# Altium PCB Xilinx_JTAG-SMT2.PcbDoc
Units mm, origin at the board's own origin, x right, y up, seen from the top; angles counter-clockwise.
Board outline 45.5 x 23.5 mm, 2 copper layers (Top Layer, Bottom Layer); 55 components, 56 nets, 269 pads, 148 vias.
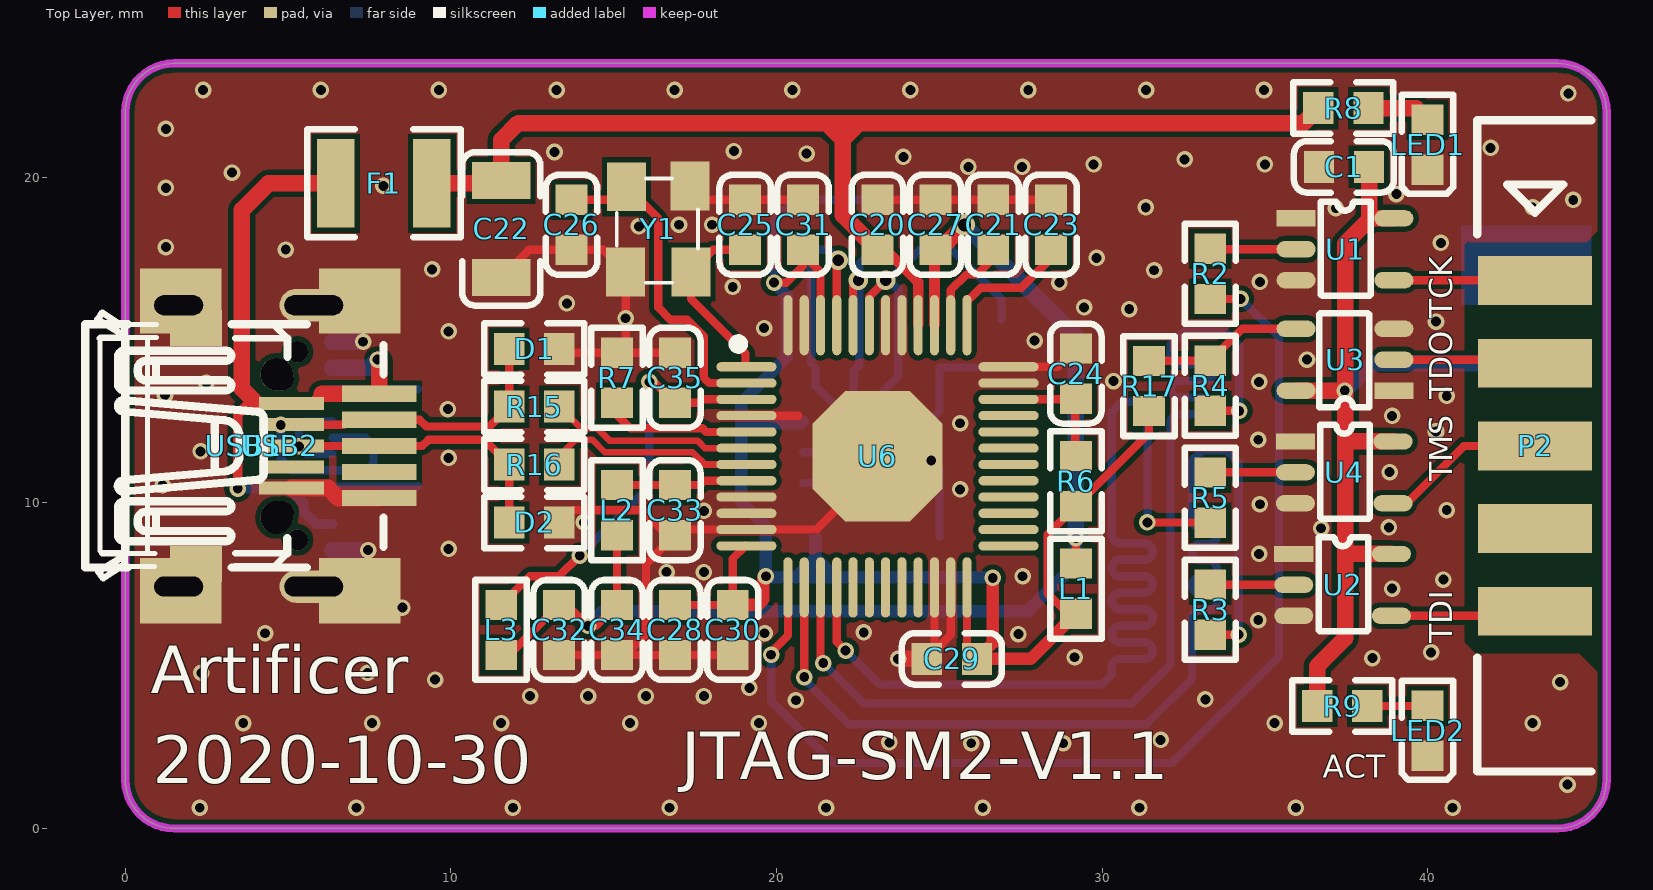
[diagram p0: Top Layer view]
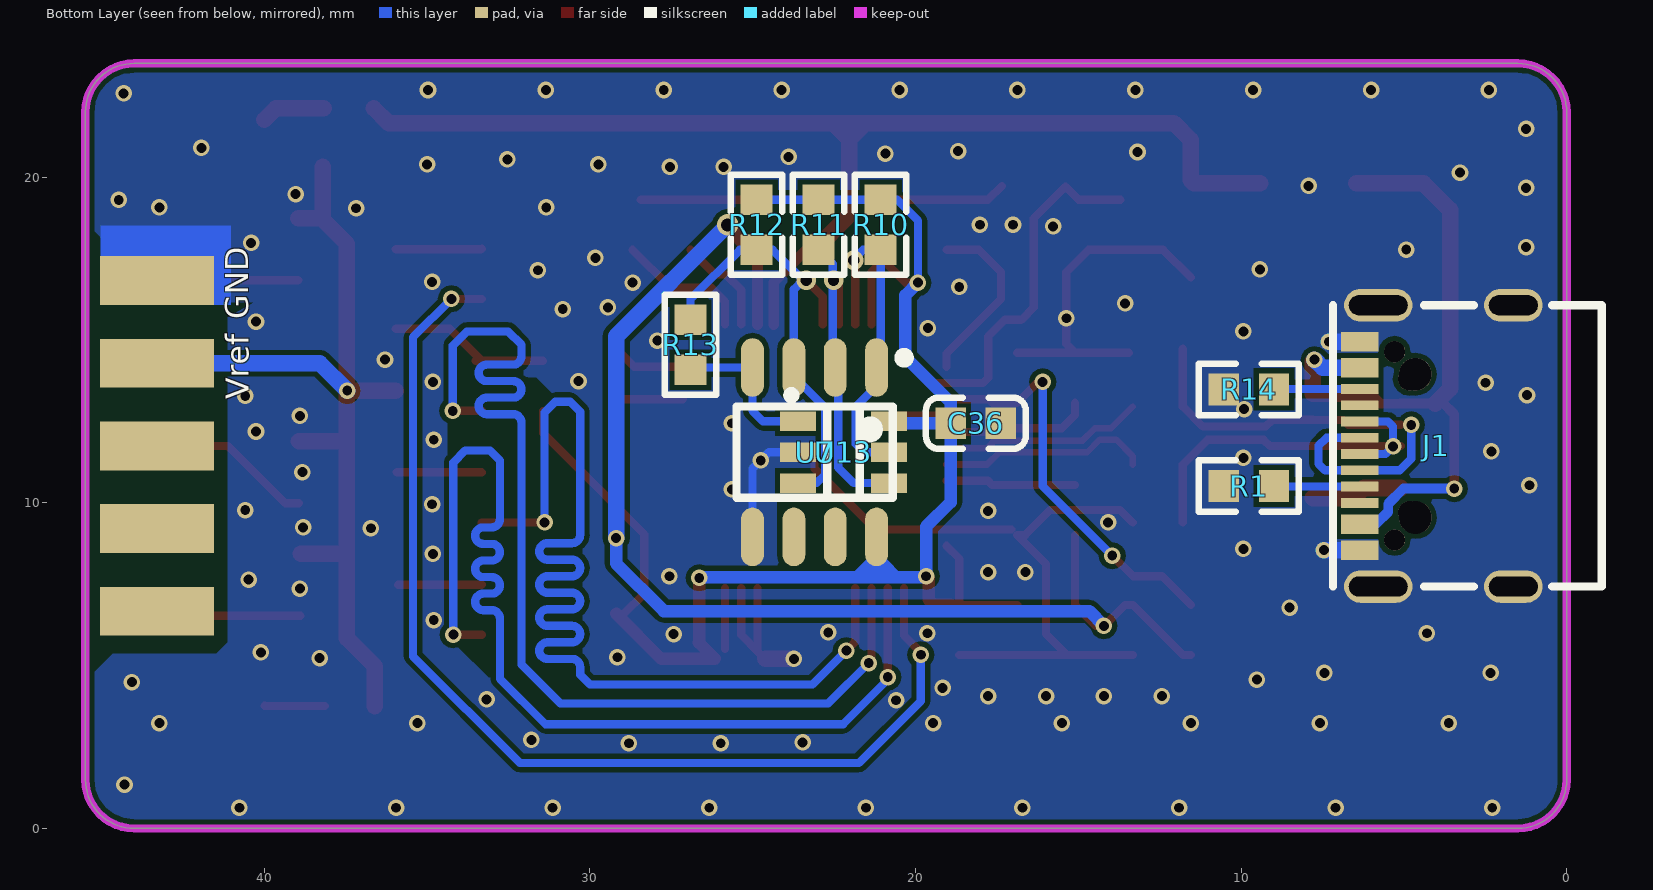
[diagram p1: Bottom Layer view, seen from below]

## Layer stack, top to bottom
Top Solder: solder mask 0.0102, Solder Resist, Dk 3.5
Top Layer: signal copper 0.0356
Dielectric 1: dielectric 0.32, FR-4, Dk 4.8
Bottom Layer: signal copper 0.0356
Bottom Solder: solder mask 0.0102, Solder Resist, Dk 3.5

## Board outline
0,1.5 0,22 cw(c1.5,22) 1.5,23.5 44,23.5 cw(c44,22) 45.5,22 45.5,1.5 cw(c44,1.5) 44,0 1.5,0 cw(c1.5,1.5)

## Design rules (kind name [scope] priority, off if disabled: settings)
Clearance [All] p1: gap=0.152
ComponentClearance [All] p1 off: gap=0.254 collisioncheckmode=3 verticalgap=0.254 showdistances=FALSE
DiffPairsRouting [All] p1: maxlimit=0.254 minlimit=0.254 mostfreqgap=0.254 toplayer_minwidth=0.381 toplayer_maxwidth=0.381 toplayer_prefwidth=0.381 bottomlayer_minwidth=0.381 bottomlayer_maxwidth=0.381 bottomlayer_prefwidth=0.381 maxuncoupledlength=12.7
HoleSize [All] p1: absolutevalues=TRUE maxlimit=3 minlimit=0.025 maxpercent=80.000 minpercent=20.000
HoleToHoleClearance [All] p1 off: gap=0.254 allowstackedmicrovias=TRUE
MinimumSolderMaskSliver [All] p1 off: minsoldermaskwidth=0.254
PolygonConnect PolygonConnect_GND [InNet('GND')] p1: connectstyle=Direct reliefconductorwidth=0.254 reliefentries=4 polygonreliefangle="90 Angle" airgapwidth=0.254
PolygonConnect [All] p2: connectstyle=Relief reliefconductorwidth=0.254 reliefentries=4 polygonreliefangle="90 Angle" airgapwidth=0.254
RoutingVias [All] p1: holewidth=0.305 width=0.508 viastyle="Through Hole" minholewidth=0.305 minwidth=0.508 maxholewidth=0.711 maxwidth=1.27
SilkToSilkClearance [All] p1 off: silktosilkclearance=0.254
SilkToSolderMaskClearance [IsPad] p1 off: minsilkscreentomaskgap=0.254 clearancetoexposedcopper=TRUE
SolderMaskExpansion [All] p1: expansion=0.102
Width [All] p1: maxlimit=3 minlimit=0.152 preferedwidth=0.152
23 further rules are at their usual default settings.

## Classes and differential pairs
net class jatg: TCK TDI TDO TMS
differential pair USB: +USB_P -USB_N
differential pair USBD: +USBD_P -USBD_N

## Components (designator, comment, footprint, x,y, rotation, side; value= is the part's Value field where it differs from the comment)
C1 "0.1uF" LC-0603_C 37.432,20.32 r180 top
C20 "0.1uF" LC-0603_C 23.103,18.542 r90 top
C21 "0.1uF" LC-0603_C 26.659,18.542 r90 top
C22 "10uF" LC-1206_C 11.546,18.415 r270 top
C23 "0.1uF" LC-0603_C 28.437,18.542 r90 top
C24 "0.1uF" LC-0603_C 29.199,13.97 r270 top
C25 "27pF" LC-0603_C 19.039,18.542 r270 top
C26 "27pF" LC-0603_C 13.705,18.542 r270 top
C27 "0.1uF" LC-0603_C 24.881,18.542 r90 top
C28 "0.1uF" LC-0603_C 16.88,6.096 r270 top
C29 "0.1uF" LC-0603_C 25.389,5.207 r180 top
C30 "0.1uF" LC-0603_C 18.658,6.096 r270 top
C31 "0.1uF" LC-0603_C 20.817,18.542 r90 top
C32 "0.1uF" LC-0603_C 13.324,6.096 r270 top
C33 "0.1uF" LC-0603_C 16.88,9.779 r270 top
C34 "0.1uF" LC-0603_C 15.102,6.096 r270 top
C35 "0.1uF" LC-0603_C 16.88,13.843 r90 top
C36 "0.1uF" LC-0603_C 18.15,12.446 r180 bottom
D1 "Res1" LC-0603_R 12.562,14.732 r0 top
D2 "Res1" LC-0603_R 12.562,9.398 r0 top
F1 "Fuse 1" LC-1210_R 7.941,19.812 r0 top
J1 "TYPE-C16PIN" USB-C-SMD_TYPE-C16PIN 4,11.75 r90 bottom locked
L1 "120OHM@100Mhz" LC-0603_L 29.199,7.366 r270 top
L2 "120OHM@100Mhz" LC-0603_L 15.102,9.779 r90 top
L3 "120OHM@100Mhz" LC-0603_L 11.546,6.096 r90 top
LED1 "LED-SMD" MY-0603_LED_B 40,21 r90 top locked
LED2 "LED-SMD" MY-0603_LED_B 40,3 r90 top locked
P2 "Header 5X2" HD2x5_W 43.3,16.83 r0 top locked
R1 "Res1" LC-0603_R 9.762,10.516 r0 bottom
R2 "Res1" LC-0603_R 33.325,17.035 r90 top
R3 "Res1" LC-0603_R 33.325,6.723 r90 top
R4 "Res1" LC-0603_R 33.325,13.598 r90 top
R5 "Res1" LC-0603_R 33.325,10.16 r90 top
R6 "Res1" LC-0603_R 29.199,10.668 r90 top
R7 "Res1" LC-0603_R 15.102,13.843 r270 top
R8 "Res1" LC-0603_R 37.414,22.123 r0 top
R9 "Res1" LC-0603_R 37.381,3.759 r0 top
R10 "Res1" LC-0603_R 21.071,18.542 r90 bottom
R11 "Res1" LC-0603_R 22.976,18.542 r90 bottom
R12 "Res1" LC-0603_R 24.881,18.542 r90 bottom
R13 "Res1" LC-0603_L 26.913,14.859 r270 bottom
R14 "Res1" LC-0603_R 9.762,13.487 r0 bottom
R15 "Res1" LC-0603_R 12.562,12.954 r180 top
R16 "Res1" LC-0603_R 12.562,11.176 r180 top
R17 "Res1" LC-0603_R 31.445,13.589 r270 top
U1 "SN74LVC1G125" SOT-23-5 35.913,18.74 r0 top
U2 "SN74LVC1G125" SOT-23-5 35.839,8.433 r0 top
U3 "SN74LVC1G125" SOT-23-5 39.014,13.447 r180 top
U4 "SN74LVC1G125" SOT-23-5 35.887,11.887 r0 top
U6 "FT232HL" MY-LQFP-QFN-48_7X7X05P 23.103,11.43 r270 top locked
U7 "93LC56BISN" LC-SOIC-8_150mil 23.103,11.557 r0 bottom
U13 "93LC56BT" LC-SOT-23-6 22.214,11.557 r0 bottom
USB1 "USB5PIN" MICROUSB 3.5,11.75 r90 top locked
USB2 "MICRO-USB-SMD_MINI 5P" "MICRO-USB-SMD_MINI 5P" 4.5,11.75 r0 top locked
Y1 "12MHz" XTAL-3225 16.372,18.415 r0 top

## Footprints (in the part's own frame and the unit in brackets; to place one, negate y for a bottom-side part, rotate by r counter-clockwise, add the part's x,y. Pads: shape width x height; smd on the part's side, far side on the other; paste and mask are expansions set on the pad)
HD2x5_W [mm]
  rect 3.5x1.5 smd: 1(0,0) 3(0,-2.54) 5(0,-5.08) 7(0,-7.62) 9(0,-10.16)
  rect 3.5x1.5 smd far side: 2(0,0) 4(0,-2.54) 6(0,-5.08) 8(0,-7.62) 10(0,-10.16)
  silkscreen extent -1.78,-15.08 1.72,4.92
LC-0603_C [mm]
  rect 0.93x0.98 smd: 1(-0.77,0) 2(0.77,0)
  silkscreen extent -1.53,-0.79 1.54,0.79, body extent -0.8,-0.4 0.8,0.4, height 0.3
LC-0603_L [mm]
  rect 0.93x0.98 smd: 1(-0.77,0) 2(0.77,0)
  silkscreen extent -1.53,-0.79 1.54,0.79, body extent -0.82,-0.41 0.83,0.41, height 0.46
LC-0603_R [mm]
  rect 0.93x0.98 smd: 1(-0.77,0) 2(0.77,0)
  silkscreen extent -1.53,-0.79 1.54,0.79, body extent -0.85,-0.4 0.85,0.4, height 0.56
LC-1206_C [mm]
  rect 1.13x1.8 smd: 1(-1.49,0) 2(1.49,0)
  silkscreen extent -2.36,-1.2 2.35,1.2, body extent -1.6,-0.81 1.6,0.79, height 1
LC-1210_R [mm]
  rect 1.16x2.72 smd: 1(-1.475,0) 2(1.475,0)
  silkscreen extent -2.35,-1.66 2.36,1.66, body extent -1.6,-1.25 1.6,1.25, height 0.6
LC-SOIC-8_150mil [mm]
  oval 0.7x1.8 smd: 1(-1.905,-2.6) 2(-0.635,-2.6) 3(0.635,-2.6) 4(1.905,-2.6) 5(1.905,2.6) 6(0.635,2.6) 7(-0.635,2.6) 8(-1.905,2.6)
  silkscreen extent -2.9,-3.05 2.4,1.4
LC-SOT-23-6 [mm]
  rect 1.1x0.6 smd: 1(1.4,-0.95) 2(1.4,0) 3(1.4,0.95) 4(-1.4,0.95) 5(-1.4,0) 6(-1.4,-0.95)
  silkscreen extent -0.5,-1.87 1.73,1.4
"MICRO-USB-SMD_MINI 5P" [mm]
  rect 2.3x0.5 smd: 1(3.3,1.6) 2(3.3,0.8) 3(3.3,0) 4(3.3,-0.8) 5(3.3,-1.6)
  rect 2.5x2 smd: 6(2.7,-4.45) 7(-2.8,-4.45) 8(-2.8,4.45) 9(2.7,4.45)
  round 1 hole 1 unplated: ""(0.15,-2.2) ""(0.15,2.2)
  silkscreen extent -5.73,-3.74 3.43,3.74
MICROUSB [mm]
  round 0.7 hole 0.7: 0(-2.05,-1.325) 0(2.05,-1.325)
  rect 0.4x2 smd: 1(1.3,-1.6) 2(0.65,-1.6) 3(0,-1.6) 4(-0.65,-1.6) 5(-1.3,-1.6)
  rect 1.1x1.6 smd: 6(-3.625,1.325) 7(3.625,1.325)
  silkscreen extent -4.06,-1.48 4.09,4.36, body extent -4,-1.67 4,3.96, height 2.7
MY-0603_LED_B [mm]
  rect 0.93x0.98 smd: A(0.77,0) K(-0.77,0)
  silkscreen extent -1.5,-0.79 1.54,0.79, body extent -0.8,-0.4 0.8,0.4, height 0.61
MY-LQFP-QFN-48_7X7X05P [mm]
  oval 0.28x0.8 smd mask+0.051: 1(-2.75,-3.5) 2(-2.25,-3.5) 3(-1.75,-3.5) 4(-1.25,-3.5) 5(-0.75,-3.5) 6(-0.25,-3.5) 7(0.25,-3.5) 8(0.75,-3.5) 9(1.25,-3.5) 10(1.75,-3.5) 11(2.25,-3.5) 12(2.75,-3.5) 25(2.75,3.5) 26(2.25,3.5) 27(1.75,3.5) 28(1.25,3.5) 29(0.75,3.5) 30(0.25,3.5) 31(-0.25,3.5) 32(-0.75,3.5) 33(-1.25,3.5) 34(-1.75,3.5) 35(-2.25,3.5) 36(-2.75,3.5)
  oval 0.28x1.8 smd mask+0.051: 1(-2.75,-4.05) 2(-2.25,-4.05) 3(-1.75,-4.05) 4(-1.25,-4.05) 5(-0.75,-4.05) 6(-0.25,-4.05) 7(0.25,-4.05) 8(0.75,-4.05) 9(1.25,-4.05) 10(1.75,-4.05) 11(2.25,-4.05) 12(2.75,-4.05) 25(2.75,4.05) 26(2.25,4.05) 27(1.75,4.05) 28(1.25,4.05) 29(0.75,4.05) 30(0.25,4.05) 31(-0.25,4.05) 32(-0.75,4.05) 33(-1.25,4.05) 34(-1.75,4.05) 35(-2.25,4.05) 36(-2.75,4.05)
  oval 0.8x0.28 smd mask+0.051: 13(3.5,-2.75) 14(3.5,-2.25) 15(3.5,-1.75) 16(3.5,-1.25) 17(3.5,-0.75) 18(3.5,-0.25) 19(3.5,0.25) 20(3.5,0.75) 21(3.5,1.25) 22(3.5,1.75) 23(3.5,2.25) 24(3.5,2.75) 37(-3.5,2.75) 38(-3.5,2.25) 39(-3.5,1.75) 40(-3.5,1.25) 41(-3.5,0.75) 42(-3.5,0.25) 43(-3.5,-0.25) 44(-3.5,-0.75) 45(-3.5,-1.25) 46(-3.5,-1.75) 47(-3.5,-2.25) 48(-3.5,-2.75)
  oval 1.8x0.28 smd mask+0.051: 13(4.05,-2.75) 14(4.05,-2.25) 15(4.05,-1.75) 16(4.05,-1.25) 17(4.05,-0.75) 18(4.05,-0.25) 19(4.05,0.25) 20(4.05,0.75) 21(4.05,1.25) 22(4.05,1.75) 23(4.05,2.25) 24(4.05,2.75) 37(-4.05,2.75) 38(-4.05,2.25) 39(-4.05,1.75) 40(-4.05,1.25) 41(-4.05,0.75) 42(-4.05,0.25) 43(-4.05,-0.25) 44(-4.05,-0.75) 45(-4.05,-1.25) 46(-4.05,-1.75) 47(-4.05,-2.25) 48(-4.05,-2.75)
  oct 4x4 smd mask+0.051: 49(0,0)
  silkscreen extent -3.6,-4.42 -3.3,-4.13, body extent -4.5,-4.33 4.5,4.68, height 1.6
SOT-23-5 [mm]
  rect 1.2x0.5 smd: 1(0.051,0)
  oval 1.2x0.5 smd: 2(0.051,-0.95) 3(0.051,-1.9) 4(3.051,-1.9) 5(3.051,0)
  silkscreen extent 0.81,-2.38 2.34,0.51
USB-C-SMD_TYPE-C16PIN [mm]
  oval 1x2.099 hole 0.61 slot 1.8 at 90 deg: 1(-4.32,1.787) 2(4.32,1.787)
  oval 1x1.799 hole 0.61 slot 1.5 at 90 deg: 3(-4.32,-2.363) 4(4.32,-2.363)
  rect 0.6x1.15 smd: A1B12(-3.2,2.362) A4B9(-2.4,2.362) B1A12(3.2,2.362) B4A9(2.4,2.362)
  rect 0.3x1.15 smd: A5(-1.25,2.362) A6(-0.25,2.362) A7(0.25,2.362) A8(-1.75,2.362) B5(1.75,2.362) B6(0.75,2.362) B7(-0.75,2.362) B8(1.25,2.362)
  round 0.65 hole 0.65 unplated: ""(-2.89,1.288) ""(2.89,1.288)
  silkscreen extent -4.32,-5.08 4.32,3.17, body extent -4.47,-5.09 4.47,2.81, height 3.21
XTAL-3225 [mm]
  rect 1.2x1.5 smd: 1(-0.978,1.295) 2(-1.003,-1.321) 3(1.003,-1.321) 4(0.978,1.321)
  silkscreen extent -1.28,-1.65 1.22,1.55, body extent -1.27,-1.65 1.23,1.55, height 0.8

## Part data
C1 C20 C21 C22 C23 C24 C25 C26 C27 C28 C29 C30 C31 C32 C33 C34 C35 C36: library part CAP, "Capacitor"
D1 D2 R1 R2 R3 R4 R5 R6 R7 R8 R9 R10 R11 R12 R13 R14 R15 R16 R17: "Resistor"
F1: "Fuse"
L1 L2 L3: library part Inductor, "Inductor"
LED1 LED2: "贴片LED"
U13: library part Component_1
USB1 USB2: library part USB-5PIN
Y1: library part 晶振, "5032晶振"

## Via types
v1: diameter 0.508, hole 0.305, Top Layer to Bottom Layer, tented both sides, 144 vias
v2: diameter 0.6, hole 0.35, Top Layer to Bottom Layer, tented both sides, 3 vias
v3: diameter 0.65, hole 0.4, Top Layer to Bottom Layer, tented both sides, 1 vias

## Nets (pads, with @x,y where several pads share a name; then routed paths per layer and width w, separated by ;. In a path a pad name is that pad's centre, name@x,y a point inside that pad or via, vN(x,y) a via of type N, cw(c..) or ccw(c..) an arc to the next point about the centre after c; other vN are vias at no path point)
+3P3V: C28.1 C29.1 C30.1 C31.1 C36.1 L1.2 R6.1 R10.2 R11.2 R12.2 R17.2 U6.12 U6.24 U6.46 U7.8 U13.6 | length 52.7
  Top Layer w0.254: C28.1 C30.1 ; C30.1@18.912,6.866 C30.1 ; U6.12@19.053,8.68 18.658,8.285 C30.1 ; v1(19.928,16.764) 20.309,16.764 20.817,17.272 C31.1@20.817,17.633 ; C31.1 C31.1@20.817,17.633 ; U6.46@21.353,15.48 21.353,17.097 C31.1@20.817,17.633 ; C29.1@25.853,5.513 U6.24@25.853,7.38 ; L1.2@28.953,6.596 28.332,7.217 28.332,9.031 R6.1 31.445,12.144 R17.2
  Top Layer w0.381: C30.1@18.912,6.866 19.428,6.866 19.596,7.034 19.596,7.669 v1(19.674,7.747) ; v1(26.645,7.696) 26.645,5.721 26.659,5.707 C29.1 27.81,5.207 L1.2
  Bottom Layer w0.254: v1(19.928,16.764) 19.928,18.669 20.571,19.312 R10.2 R11.2 R12.2
  Bottom Layer w0.381: v1(19.928,16.764) 20.316,16.376 20.316,14.485 18.92,13.089 C36.1 ; U13.6 20.753,12.446 C36.1 ; 21.198,7.841 U7.8 ; v1(26.645,7.696) 26.627,7.714 19.707,7.714 v1(19.674,7.747) 19.674,9.271 18.92,10.025 C36.1
+3POUTV: C27.1 C32.1 C34.1 L1.1 L2.1 L3.1 U6.39 | length 38.7
  Top Layer w0.254: L3.1 11.784,5.326 C32.1 13.57,6.866 v1(14.213,6.223) 14.459,6.223 C34.1 L2.1 ; L1.1 v1@29.199,8.763
  Top Layer w0.33: U6.39@24.853,15.48 24.853,17.49 C27.1@25.135,17.772
  Top Layer w0.508: C27.1 25,17.772 v3(25.77,18.542)
  Bottom Layer w0.381: v1(14.213,6.223) 14.663,6.673 27.73,6.673 29.199,8.142 v1(29.199,8.915)
  Bottom Layer w0.508: v3(25.77,18.542) 29.199,15.113 v1(29.199,8.915)
ACBUS0: U6.21
ACBUS1: U6.25
ACBUS2: U6.26
ACBUS3: U6.27
ACBUS4: U6.28
ACBUS5: U6.29
ACBUS6: U6.30
ACBUS7: U6.31
ACBUS8: U6.32
ACBUS9: U6.33
ADBU4: U6.17
ADBU5: U6.18
ADBU6: U6.19
ADBU7: U6.20
EECLK: R11.1 U6.44 U7.2 U13.4 | length 10.1
  Top Layer w0.254: U6.44@22.353,15.48 22.353,16.674 v2(22.519,16.84)
  Bottom Layer w0.254: U13.4 21.899,10.607 22.378,11.086 22.378,14.067 U7.2 22.539,14.228 22.539,17.335 R11.1
EECS: R10.1 U6.45 U7.1 U13.5 | length 10.2
  Top Layer w0.254: U6.45@21.853,15.48 21.853,17.415 21.887,17.45 v2(21.895,17.45)
  Bottom Layer w0.254: U13.5 21.579,11.557 21.833,11.811 21.833,12.954 21.198,13.589 U7.1 ; U7.1@21.071,14.284 R10.1 21.612,17.772 21.895,17.49 v2(21.895,17.45)
EEDATA: R12.1 R13.1 U6.43 U7.3 U13.3 | length 14.2
  Top Layer w0.254: U6.43@22.853,15.48 22.853,16.333 v2(23.36,16.84) v2@23.459,16.84
  Bottom Layer w0.254: U13.3 23.037,10.607 22.785,10.859 22.785,12.923 23.738,13.876 U7.3 23.738,16.561 23.459,16.84 24.39,17.772 R12.1 25.397,17.772 26.913,16.256 R13.1
EEDO: R13.2 U7.4 U13.1 | length 4.7
  Bottom Layer w0.254: U13.1 24.688,12.507 25.008,12.827 U7.4 R13.2@26.845,14.157
FPGA_NCS: P2.8
FPGA_RXD: P2.7
FPGA_SRST: P2.10
FPGA_TCK: P2.1 U1.4 | length 4.5
  Top Layer w0.254: U1.4 43.49,16.84 P2.1@43.5,16.83
FPGA_TDI: P2.9 U2.4 | length 4.7
  Top Layer w0.254: U2.4 43.363,6.533 P2.9@43.5,6.67
FPGA_TDO: P2.3 U3.2 | length 4.6
  Top Layer w0.254: U3.2 43.193,14.397 P2.3 P2.3@43.5,14.29
FPGA_TMS: P2.5 U4.4 | length 5.3
  Top Layer w0.254: U4.4 39.35,9.987 41.112,11.75 P2.5 P2.5@43.5,11.75
FPGA_TXD: P2.6
FPGA_VREF: C1.1 P2.4 R9.1 U1.5 U2.5 U3.5 U4.5 | length 28.7
  Top Layer w0.508: U3.5 v1(37.455,13.447) v1@37.465,13.437 ; R9.1 36.611,4.988 37.465,5.842 37.465,8.433 ; 37.541,11.887 U4.5 ; C1.1 38.202,18.786 38.247,18.74 ; U2.5 37.465,8.433 ; U1.5 38.247,18.74 ; 37.465,8.433 v1@37.465,13.437 ; v1@37.465,13.437 37.465,17.958 38.247,18.74
  Bottom Layer w0.508: v1(37.455,13.447) 38.298,14.29 P2.4 P2.4@43.5,14.29
GND: C1.2 C20.2 C21.2 C22.2 C23.2 C24.1 C25.1 C26.2 C27.2 C28.2 C29.2 C30.2 C31.2 C32.2 C33.2 C34.2 C35.2 C36.2 D1.2 D2.2 J1.1 J1.2 J1.3 J1.4 J1.A1B12 J1.B1A12 LED1.K LED2.K P2.2 R1.2 R7.1 R14.2 U1.1 U1.3 U2.1 U2.3 U3.1 U3.3 U4.1 U4.3 U6.4 U6.9 U6.10 U6.11 U6.22 U6.23 U6.35 U6.36 U6.41 U6.42 U6.47 U6.48 U6.49 U7.5 U13.2 USB1.5 USB1.6 USB1.7 USB2.5 USB2.6 USB2.7 USB2.8 USB2.9 Y1.2 Y1.4 | length 57.8
  Top Layer w0.254: C22.2 12.393,17.772 C26.2 14.691,17.772 Y1.2 15.369,14.88 R7.1 ; C32.2 C34.2 C34.2@15.348,5.326 ; D2.2 13.713,9.779 15.864,9.779 16.634,9.009 C33.2 15.991,8.12 15.991,5.969 C34.2@15.348,5.326 ; D1.2@13.451,14.613 R7.1 ; C35.2 R7.1 ; C33.2@17.051,9.18 19.053,9.18 19.603,9.18 21.234,9.18 23.103,11.049 U6.49 ; Y1.4 17.774,19.312 C25.1 C31.2 ; C30.2 C28.2 C34.2@15.348,5.326 ; U6.4@19.053,12.68 20.67,12.68 ; C20.2@23.357,19.312 C27.2 C21.2 C23.2 ; C29.2 C29.2@24.853,5.441 ; U6.22@24.853,7.38 C29.2@24.853,5.441 ; U6.23@25.353,7.38 25.353,5.941 C29.2@24.853,5.441 ; U6.36@27.153,14.18 28.639,14.18 C24.1
  Top Layer w0.508: USB1.5@5.1,10.456 6.231,10.456 6.538,10.15 USB2.5 ; v1(23.738,5.207) C29.2
  Bottom Layer w0.254: U13.2 24.5,11.557 25.008,11.049 U7.5
  Bottom Layer w0.508: J1.A1B12 v1(7.458,8.55) ; J1.B1A12 v1(7.305,14.95)
  other v1: 2.286,0.635 7.096,0.635 11.906,0.635 16.716,0.635 21.526,0.635 26.337,0.635 31.147,0.635 35.957,0.635 40.767,0.635 44.298,1.346 25.984,2.616 28.804,2.616 23.47,2.642 31.801,2.718 3.624,3.235 7.584,3.235 11.544,3.235 15.504,3.235 19.464,3.235 35.304,3.235 43.224,3.235 20.599,3.937 33.172,3.962 12.435,4.064 14.213,4.064 15.991,4.064 17.769,4.064 19.166,4.318 44.069,4.496 9.514,4.572 2.337,4.775 7.442,4.775 38.303,5.232 29.159,5.258 40.107,5.41 27.432,5.969 4.293,5.994 19.634,5.994 22.682,6.02 34.798,6.401 8.509,6.782 38.913,7.366 40.488,7.645 27.559,7.747 16.626,7.874 17.769,7.874 34.823,8.433 9.931,8.585 36.728,9.22 38.811,9.246 14.086,9.398 17.769,9.754 40.589,9.779 34.849,9.957 25.643,10.414 1.143,10.541 38.837,10.947 24.754,11.303 9.931,11.379 2.311,11.582 34.798,11.938 40.259,12.192 25.643,12.446 38.913,12.675 9.906,12.878 40.589,13.284 1.219,13.31 2.489,13.691 34.823,13.716 30.353,13.741 36.297,14.402 27.929,14.986 9.931,15.265 19.623,15.367 40.259,15.57 15.369,15.672 30.836,15.951 29.453,16.002 13.564,16.129 18.658,16.637 28.691,16.764 34.849,16.789 31.598,17.145 9.423,17.17 29.834,17.526 4.928,17.78 1.245,17.856 40.411,17.983 15.773,18.491 17.007,18.542 18.023,18.542 37.186,19.05 31.344,19.075 43.224,19.075 44.475,19.304 39.04,19.482 1.245,19.672 7.925,19.736 3.277,20.142 25.897,20.32 27.548,20.32 29.743,20.396 35.001,20.396 32.537,20.549 23.901,20.625 20.93,20.726 13.183,20.777 18.694,20.803 41.935,20.904 1.245,21.488 44.323,22.581 2.388,22.682 6.009,22.682 9.629,22.682 13.25,22.682 16.871,22.682 20.492,22.682 24.113,22.682 27.734,22.682 31.355,22.682 34.976,22.682
JTAG_TCK: R2.2 U1.2 | length 2.6
  Top Layer w0.254: R2.2 33.34,17.79 U1.2
JTAG_TDI: R3.2 U2.2 | length 2.6
  Top Layer w0.254: R3.2 33.335,7.483 U2.2
JTAG_TDO: R4.2 R17.1 U3.4 | length 5.1
  Top Layer w0.254: R17.1 31.454,14.368 R4.2 ; R4.2@33.511,14.368 R4.2 ; U3.4 34.304,15.347 R4.2
JTAG_TMS: R5.2 U4.2 | length 2.6
  Top Layer w0.254: R5.2 33.332,10.937 U4.2
NetC21_1: C21.1 U6.38 | length 3.1
  Top Layer w0.254: U6.38@25.353,15.48 25.353,16.534 25.837,17.018 26.159,17.018 C21.1@26.913,17.772
NetC23_1: C23.1 U6.37 | length 4.2
  Top Layer w0.254: U6.37@25.853,15.48 25.853,16.187 26.278,16.612 27.531,16.612 C23.1@28.691,17.772
NetC24_2: C24.2 R6.2 U6.34 | length 3.8
  Top Layer w0.254: U6.34@27.153,13.18 29.179,13.18 29.179,11.458 R6.2
NetC25_2: C25.2 U6.1 Y1.3 | length 5.6
  Top Layer w0.254: C25.2 18.053,17.772 Y1.3 17.375,16.269 19.053,14.591 U6.1@19.053,14.18
NetC26_1: C26.1 U6.2 Y1.1 | length 10.9
  Top Layer w0.254: C26.1 14.996,19.312 Y1.1 16.372,18.732 16.372,16.002 16.753,15.621 17.261,15.621 17.769,15.113 17.769,13.843 17.932,13.68 U6.2@19.603,13.68
NetJ1_A5: J1.A5 R1.1 | length 2.6
  Bottom Layer w0.254: J1.A5 8.976,10.5 R1.1
NetJ1_B5: J1.B5 R14.1 | length 2.6
  Bottom Layer w0.254: J1.B5 8.979,13.5 R14.1
NetLED1_A: LED1.A R8.2 | length 2
  Top Layer w0.508: R8.2 39.647,22.123 LED1.A
NetLED2_A: LED2.A R9.2 | length 1.9
  Top Layer w0.254: R9.2 39.989,3.759 LED2.A
NetR7_2: R7.2 U6.5 | length 4.5
  Top Layer w0.254: R7.2 15.102,12.7 15.508,12.294 17.729,12.294 17.843,12.18 U6.5@19.053,12.18
TCK: R2.1 U6.13 | length 33.8
  Top Layer w0.254: v1(19.837,5.334) 19.837,5.41 20.353,5.926 U6.13@20.353,7.38 ; R2.1 v1(34.255,16.265)
  Bottom Layer w0.254: v1(19.837,5.334) 19.837,3.912 21.742,2.007 32.156,2.007 35.433,5.283 35.433,15.088 v1(34.255,16.265)
TDI: R3.1 U6.14 | length 33.8
  Top Layer w0.254: v1@20.853,4.649 U6.14@20.853,7.38 ; R3.1 v1(34.198,5.953)
  Bottom Layer w0.254: v1(20.853,4.648) 20.777,4.648 22.225,3.2 31.369,3.2 32.766,4.597 32.766,5.944 32.766,6.198 32.766,6.452 cw(c33.02,6.452) 33.02,6.706 33.274,6.706 ccw(c33.274,6.96) 33.528,6.96 ccw(c33.274,6.96) 33.274,7.214 33.02,7.214 cw(c33.02,7.468) 32.766,7.468 cw(c33.02,7.468) 33.02,7.722 33.274,7.722 ccw(c33.274,7.976) 33.528,7.976 ccw(c33.274,7.976) 33.274,8.23 33.02,8.23 cw(c33.02,8.484) 32.766,8.484 cw(c33.02,8.484) 33.02,8.738 33.274,8.738 ccw(c33.274,8.992) 33.528,8.992 ccw(c33.274,8.992) 33.274,9.246 33.02,9.246 cw(c33.02,9.5) 32.766,9.5 32.766,11.074 32.766,11.303 33.071,11.608 33.833,11.608 34.198,11.243 v1(34.198,5.953)
TDO: R4.1 U6.15 | length 33.6
  Top Layer w0.254: U6.15@21.353,7.38 21.353,5.165 v1(21.438,5.08) ; R4.1 v1(34.215,12.828)
  Bottom Layer w0.254: v1(21.438,5.08) 22.682,3.835 30.912,3.835 32.106,5.029 32.106,11.836 32.106,12.471 cw(c32.36,12.471) 32.36,12.725 33.165,12.725 ccw(c33.165,12.979) 33.419,12.979 ccw(c33.165,12.979) 33.165,13.233 32.36,13.233 cw(c32.36,13.487) 32.106,13.487 cw(c32.36,13.487) 32.36,13.741 33.165,13.741 ccw(c33.165,13.995) 33.419,13.995 ccw(c33.165,13.995) 33.165,14.249 32.36,14.249 cw(c32.36,14.503) 32.106,14.503 32.106,14.859 32.512,15.265 33.782,15.265 34.215,14.833 v1(34.215,12.828)
TMS: R5.1 U6.16 | length 33.8
  Top Layer w0.254: U6.16@21.853,7.38 21.853,5.731 v1(22.123,5.461) ; v1(31.394,9.398) 33.317,9.398 R5.1
  Bottom Layer w0.254: v1(22.123,5.461) 23.165,4.42 29.997,4.42 30.302,4.724 30.302,4.953 cw(c30.556,4.953) 30.556,5.207 31.305,5.207 ccw(c31.305,5.461) 31.559,5.461 ccw(c31.305,5.461) 31.305,5.715 30.556,5.715 cw(c30.556,5.969) 30.302,5.969 cw(c30.556,5.969) 30.556,6.223 31.305,6.223 ccw(c31.305,6.477) 31.559,6.477 ccw(c31.305,6.477) 31.305,6.731 30.556,6.731 cw(c30.556,6.985) 30.302,6.985 cw(c30.556,6.985) 30.556,7.239 31.305,7.239 ccw(c31.305,7.493) 31.559,7.493 ccw(c31.305,7.493) 31.305,7.747 30.556,7.747 cw(c30.556,8.001) 30.302,8.001 cw(c30.556,8.001) 30.556,8.255 31.305,8.255 ccw(c31.305,8.509) 31.559,8.509 ccw(c31.305,8.509) 31.305,8.763 30.556,8.763 cw(c30.556,9.017) 30.302,9.017 30.302,12.802 30.607,13.106 31.064,13.106 31.394,12.776 v1(31.394,9.398)
USB_5V: C20.1 C22.1 F1.2 R8.1 U6.40 | length 36
  Top Layer w0.33: C20.1@23.357,17.772 24.353,16.776 U6.40@24.353,15.48
  Top Layer w0.508: F1.2 11.453,19.812 C22.1 11.546,21.147 12.065,21.666 22.036,21.666 ; C20.1 22.036,18.839 22.036,21.666 ; R8.1 36.187,21.666 22.036,21.666
USB_N: D1.1 J1.A7 J1.B7 R15.2 USB1.2 USB2.2 | length 14.9
  Top Layer w0.254: USB1.2 6.71,12.4 6.858,12.548 7.797,12.548 USB2.2 9.04,12.55 9.246,12.344 11.182,12.344 R15.2 D1.1
  Bottom Layer w0.254: v1(4.775,12.395) 4.775,11.354 5.129,11 J1.B7 7.419,11 7.62,11.201 7.62,11.76 7.38,12 J1.A7
USB_P: D2.1 J1.A6 J1.B6 R16.2 USB1.3 USB2.3 | length 11.7
  Top Layer w0.254: USB1.3 USB2.3 9.118,11.75 9.306,11.938 11.03,11.938 R16.2 D2.1
  Bottom Layer w0.254: J1.A6 5.569,11.5 v1(5.334,11.735) 5.334,12.344 5.49,12.5 J1.B6
USBD_N: R15.1 U6.6 | length 6.2
  Top Layer w0.203: R15.1 13.992,12.294 14.492,12.294 14.873,11.913 17.571,11.913 17.804,11.68 U6.6@19.053,11.68
USBD_P: R16.1 U6.7 | length 6.5
  Top Layer w0.203: R16.1 13.332,11.438 13.832,11.938 14.345,11.938 14.726,11.557 17.424,11.557 17.801,11.18 U6.7@19.053,11.18
VIN_5V: F1.1 J1.A4B9 J1.B4A9 USB1.1 USB2.1 | length 22.3
  Top Layer w0.305: v1(3.454,10.439) 3.454,12.72 3.785,13.05 4.039,13.05 USB1.1 ; USB1.1@5.1,13.044 5.728,13.044 6.035,13.35
  Top Layer w0.508: 4.039,13.05 3.581,13.507 3.581,18.999 4.394,19.812 F1.1 ; 6.035,13.35 USB2.1 7.8,14.349 v1(7.747,14.402)
  Bottom Layer w0.305: v1(3.454,10.439) 5.012,10.439 5.48,9.971 5.48,9.726 5.856,9.35 J1.A4B9
  Bottom Layer w0.508: J1.B4A9 7.495,14.15 v1(7.747,14.402)
VPHY: C35.1 L3.2 U6.3 | length 12.5
  Top Layer w0.254: L3.2 12.427,7.747 13.324,7.747 v1(13.959,8.382) ; v1(16.094,13.716) 16.237,13.716 C35.1 17.634,13.073 17.741,13.18 U6.3@19.053,13.18
  Bottom Layer w0.254: v1(13.959,8.382) 16.094,10.516 v1(16.094,13.716)
VPLL: C33.1 L2.2 U6.8 | length 4
  Top Layer w0.254: L2.2 17.65,10.549 17.781,10.68 U6.8@19.053,10.68
pads on no net: J1. J1.A8 J1.B8 U7.6 U7.7 USB1.0 USB1.4 USB2. USB2.4

## Polygon pours and split planes (outlines as drawn)
GND on Bottom Layer "Bottom Layer-No Net" (solid, remove dead copper, pour order 0): 0,0 45.517,0 45.517,23.52 0,23.52
GND on Top Layer "Bottom Layer-No Net" (solid, remove dead copper, pour order 2): 0,0 45.517,0 45.517,23.52 0.025,23.52 0,23.52

## Keep-outs
Keep-Out Layer:
  the board outline again, w0.254

## Other copper
Top Layer:
  pour cut-out: 41.275,18.059 41.123,17.907 41.123,5.715 41.478,5.359 44.653,5.359 45.206,4.807 45.491,5.092 45.491,18.362 45.235,18.362 44.882,18.009 41.275,18.009
  pour cut-out: 3.759,10.414 3.759,10.592 4.166,10.998
  region net USB_5V: 21.209,21.641 21.895,20.955 22.174,20.955 22.784,21.565
Bottom Layer:
  rectangle net GND: 41.021,16.078 45.034,18.517
  pour cut-out: 40.312,16.159 41.397,16.159 41.605,15.951 41.605,15.418
  pour cut-out: 41.275,18.059 41.123,17.907 41.123,5.715 41.478,5.359 44.653,5.359 45.206,4.807 45.491,5.092 45.491,18.362 45.235,18.362 44.882,18.009 41.275,18.009
  pour cut-out: 24.257,10.592 24.25,10.585 24.25,9.507 23.985,9.507 23.8,9.322
  pour cut-out: 34.039,5.57 33.117,4.648 32.639,4.648 32.639,5.563 32.817,5.74
  pour cut-out: 34.373,13.34 34.373,11.19 34.073,10.889
  pour cut-out: 31.857,13.848 31.652,13.848 31.173,13.37 31.335,13.208 31.365,13.208
  region net +3P3V: 20.98,8.357 20.345,7.722 20.345,7.696 22.029,7.696 22.047,7.714 21.311,8.451 21.311,8.509

## Silkscreen, mask and mechanical layers (free items; w line width, h text height)
Top Overlay:
  text "TCK" at 40.996,15.672 h1.2 r90
  text "TDO" at 40.996,13.183 h1.2 r90
  text "TMS" at 40.996,10.668 h1.2 r90
  text "TDI" at 40.984,5.69 h1.2 r90
  text "Artificer" at 0.787,3.683 h2.5
  text "ACT" at 36.779,1.321 h1.2
  text "JTAG-SM2-V1.1" at 17.069,1.041 h2.5
  text "2020-10-30" at 0.838,0.914 h2.5
Bottom Overlay:
  text "GND" at 40.259,15.646 h1.2 r270
  text "Vref" at 40.257,13.183 h1.2 r270
Drill Drawing:
  text ".Legend" at 47.473,0.33 h1